# Altium PCB Miner-8Chips.PcbDoc (part 2 of 2)
Units mm, origin at the board's own origin, x right, y up, seen from the top; angles counter-clockwise.
Board outline 80.01 x 98.03 mm, 2 copper layers (Top Layer, Bottom Layer), stack 1.061 mm thick; 329 components, 236 nets, 967 pads, 0 vias.
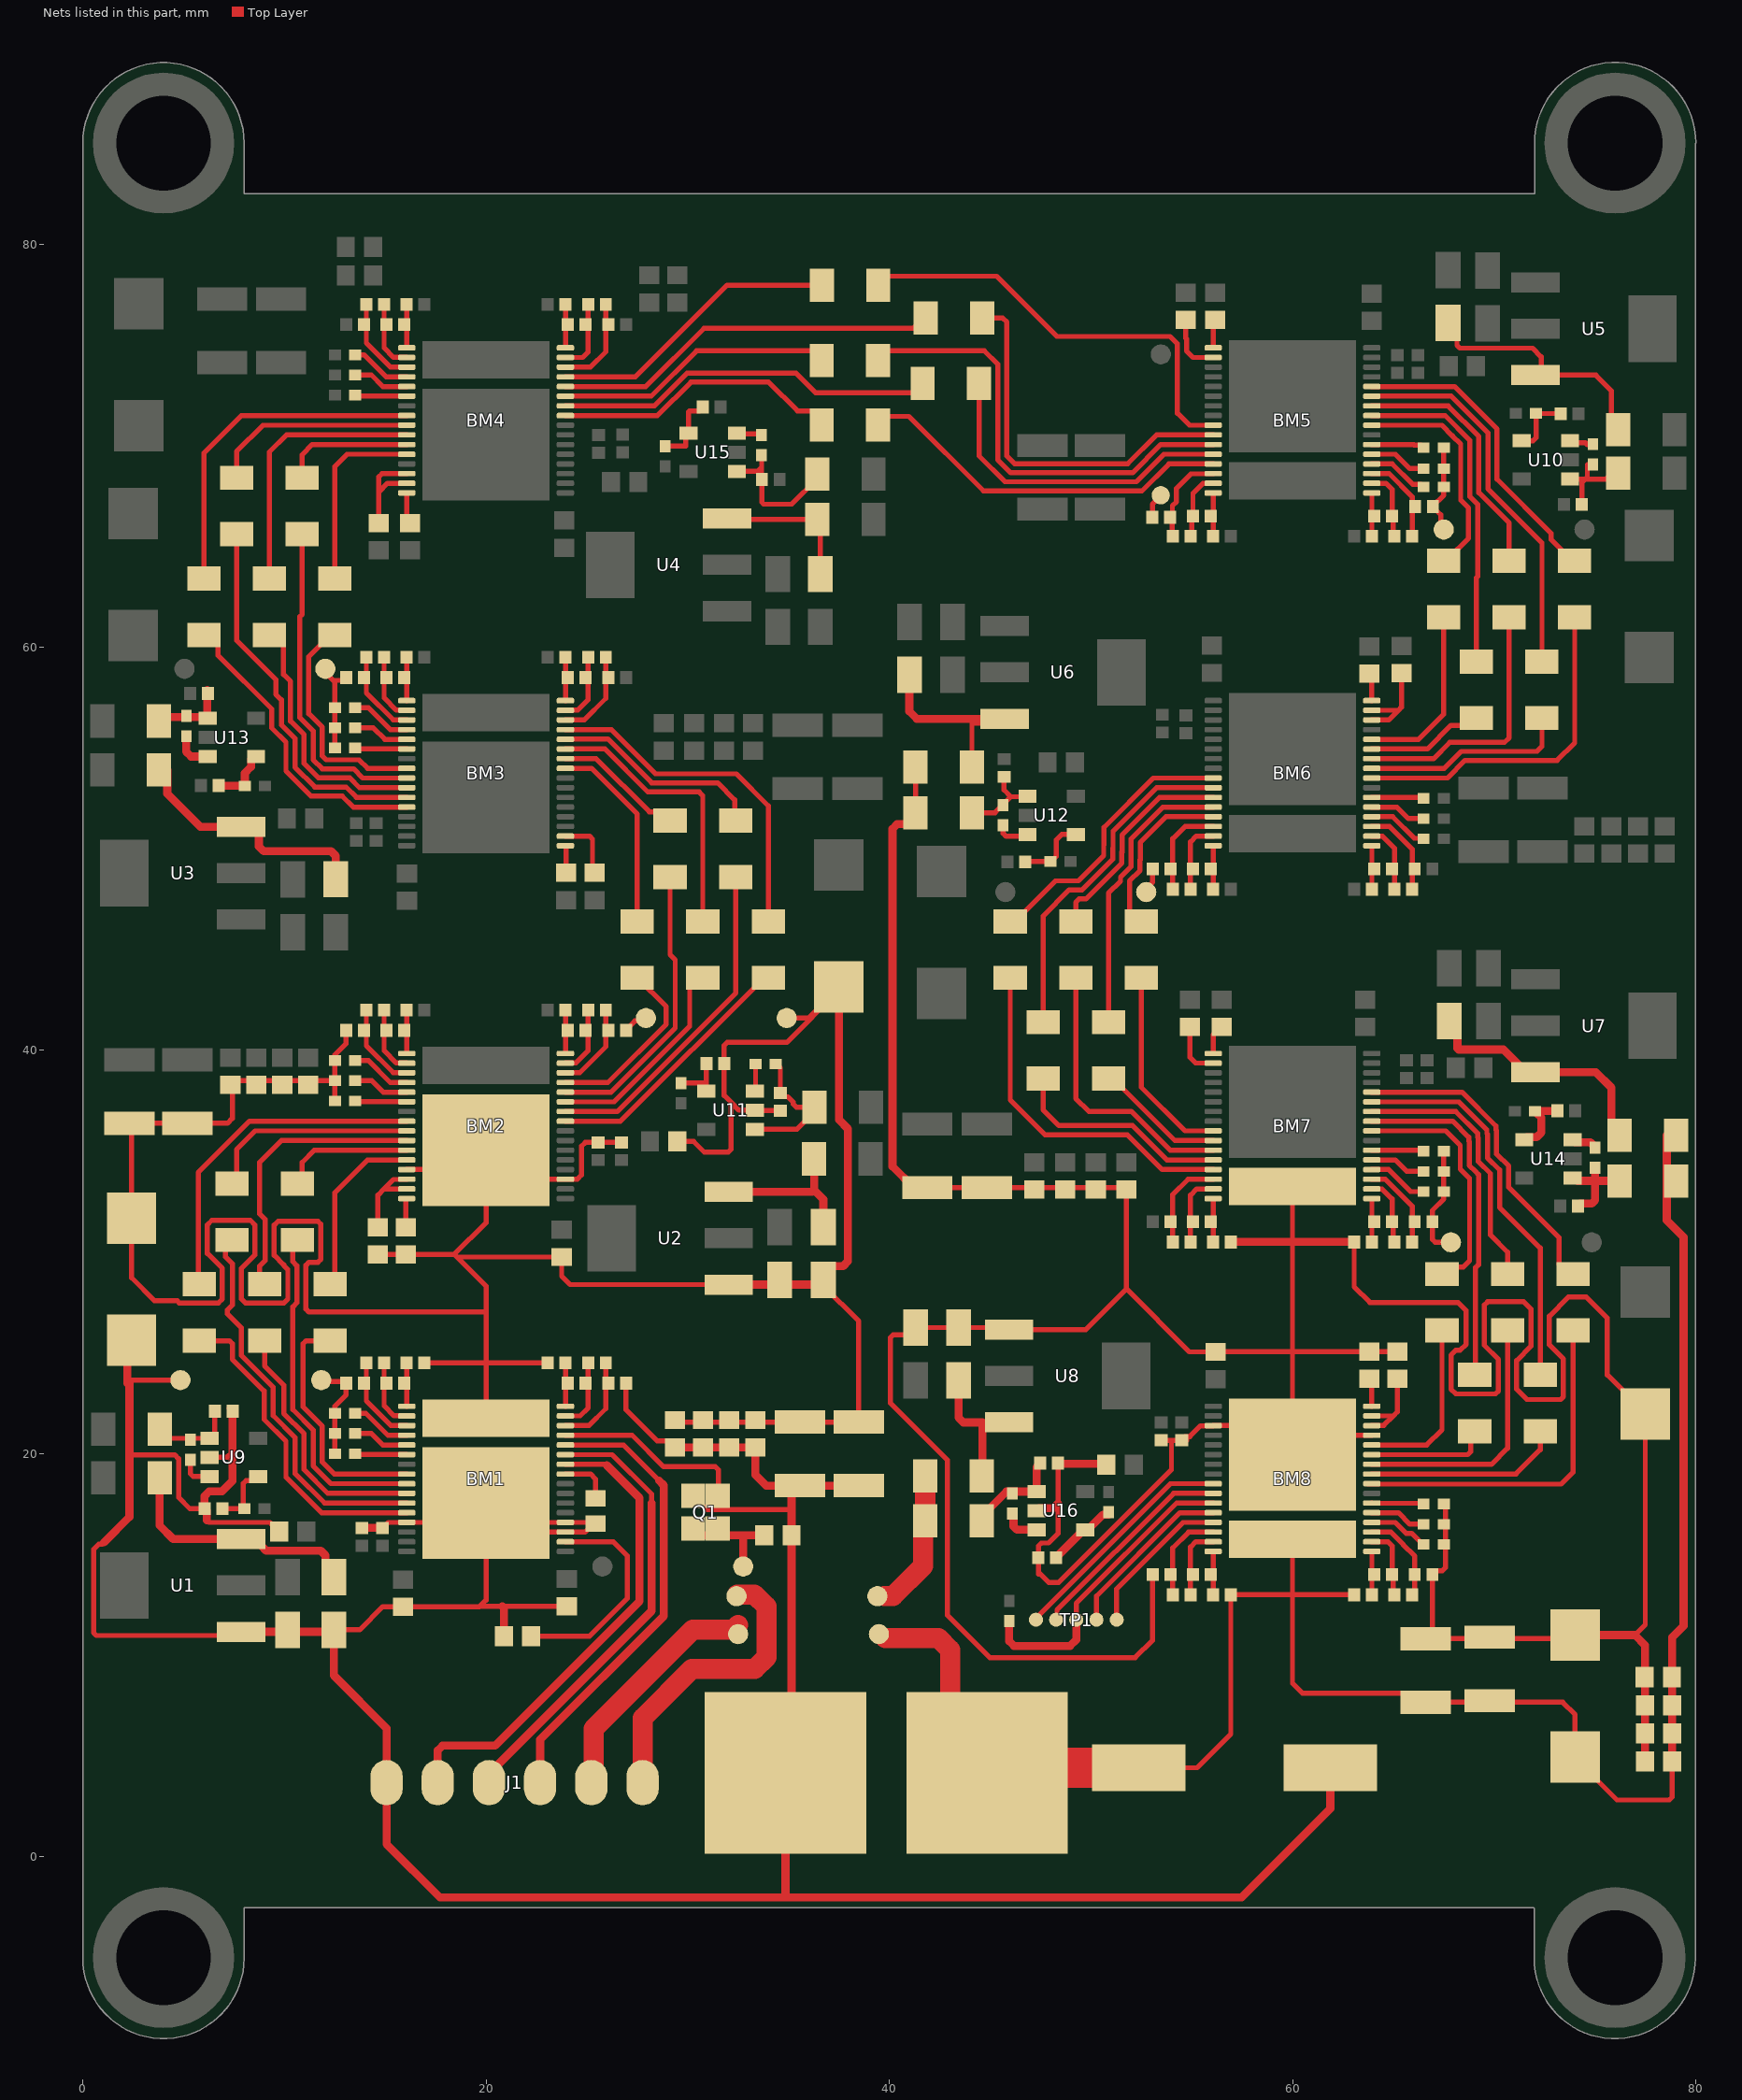
[diagram p2: the nets of this part, all layers, seen from the top]

## Nets (pads, with @x,y where several pads share a name; then routed paths per layer and width w, separated by ;. In a path a pad name is that pad's centre, name@x,y a point inside that pad or via, vN(x,y) a via of type N, cw(c..) or ccw(c..) an arc to the next point about the centre after c; other vN are vias at no path point) (continued)
3.3V-6: BM7.34 BM8.13 BM8.19 BM8.33 C96.2 C97.1 C101.1 C108.2 C113.1 C114.1 C115.1 C116.1 C127.2 C128.2 C129.2 C130.2 C131.1 C132.1 C133.1 C134.1 C135.1 C136.2 C151.2 C152.2 C180.1 C181.1 C182.1 C184.1 R28.1 R30.1 R32.1 R37.2 R38.2 R39.1 R40.1 R46.1 R56.1 U8.1 U16.2 | length 224.2
  Top Layer w0.25: R56.1@41.297,51.791 R46.1@41.297,54.051 ; R38.2@41.885,33.198 R37.2@44.831,33.198 51.665,33.198 C130.2@51.765,33.098 51.765,28.169 ; C180.1@48.37,19.533 48.37,17.53 48.37,16.042 47.899,15.57 47.549,15.57 47.396,15.418 C184.1@47.396,14.834 47.396,14.021 47.496,14.021 47.902,13.614 48.408,13.614 53.996,19.202 53.996,20.646 54,20.65 ; C108.2@53.06,14 53.06,10.744 52.197,9.881 44.983,9.881 42.875,11.989 42.875,19.687 40.056,22.506 40.056,25.756 40.202,25.902 40.95,25.902 C152.2@41.3,26.253 C151.2@43.434,26.253 45.842,26.253 U8.1@45.944,26.151 49.747,26.151 51.765,28.169 ; C182.1@53.746,20.65 54,20.65 ; C181.1@54.508,20.667 54.683,20.842 54.904,20.842 55.441,21.38 56.055,21.38 BM8.19@56.065,21.39 58.56,21.39 BM8.33@60,19.95 ; C181.1@54.762,20.65 54,20.65 ; BM7.34@60,33.25 60,30.647 60.147,30.5 60,30.353 60,25.059 ; C96.2@63.06,30.5 63.06,28.278 63.838,27.5 68.207,27.5 68.614,27.093 68.614,25.424 68.321,25.13 68.107,25.13 67.864,24.887 67.864,23.199 68.101,22.962 70.068,22.962 70.214,23.108 70.214,24.674 69.514,25.374 69.514,27.37 69.677,27.534 71.467,27.534 71.839,27.162 71.839,25.343 71.114,24.618 71.114,23.199 71.631,22.682 73.293,22.682 73.439,22.828 73.439,24.699 72.739,25.399 72.739,26.818 73.683,27.762 74.574,27.762 75.616,26.721 75.616,23.909 77.5,22.025 C131.1@77.5,21.975 77.5,11.516 76.985,11.001 ; BM8.13@63.935,20.91 60.96,20.91 BM8.33@60,19.95 ; C113.1@65.202,25.059 C114.1@63.805,25.059 60,25.059 ; R32.1@67.5,17.5 67.586,17.414 67.586,14.341 67.439,14.195 67.115,14.195 66.94,14.02 C101.1@66.94,14 66.94,11.162 R39.1@66.599,10.821 C136.2@75.108,10.821 ; 51.765,28.169 54.886,25.048 C115.1@56.185,25.048 56.196,25.059 60,25.059 ; BM8.33@60,19.95 60,25.059
  Top Layer w0.4: R56.1@41.297,51.791 41.297,51.623 40.897,51.223 40.392,51.223 40.157,50.988 40.157,34.25 41.21,33.198 R38.2@41.885,33.198 ; U16.2@47.314,17.17 47.439,17.295 48.135,17.295 48.37,17.53 ; C180.1@48.37,19.533 48.408,19.494 50.733,19.494 C116.1@50.771,19.456 ; C97.1@56.94,30.5 60.147,30.5 C96.2@63.06,30.5 ; C136.2@75.108,11.001 76.985,11.001 77.481,10.505 C134.1@77.481,7.518 C133.1@77.481,6.121 C132.1@77.481,4.724
3.3V-7: BM8.34 C104.2 C105.1 C132.2 C133.2 C134.2 C135.2 C136.1 C185.1 J2.2 R39.2 R40.2 R47.1 R62.1 R118.1 | length 98.5
  Top Layer w0.25: C185.1@52.375,4.42 55.27,4.42 56.94,6.089 C105.1@56.94,13 60,13 ; BM8.34@60,15.75 60,13 ; C104.2@63.06,13 60,13 ; C132.2@78.831,4.724 78.831,2.966 78.684,2.819 76.097,2.819 74.016,4.901 C136.1@74.016,4.951 74.016,7.061 73.406,7.671 R39.2@66.599,7.671 66.149,8.121 60.485,8.121 60,8.605 60,13
  Top Layer w0.4: R47.1@78.565,35.789 78.565,31.569 79.4,30.734 79.4,11.455 78.831,10.886 C134.2@78.831,7.518 C133.2@78.831,6.121 C132.2@78.831,4.724
  Top Layer w1: R118.1@39.8,10.846 42.443,10.846 43.029,10.26 43.029,6.802 J2.2@44.853,4.978
  Top Layer w2: J2.2@44.853,4.166 45.107,4.42 C185.1@52.375,4.42
3.3V-8: R48.1 R68.1 R117.1 | length 7
  Top Layer w1: R117.1@39.765,12.929 40.183,12.929 41.68,14.426 41.68,16.562 R68.1@41.78,16.662 R48.1@41.78,18.898
BO1: BM2.8 R81.1 | length 17.1
  Top Layer w0.25: R81.1@6,28.4 5.722,28.678 5.722,33.942 8.271,36.49 BM2.8@16.065,36.49
BO2: BM3.25 R82.2 | length 9.8
  Top Layer w0.25: BM3.25@23.935,53.99 25.233,53.99 27.5,51.723 R82.2@27.5,46.4
BO3: BM4.8 R96.1 | length 17.1
  Top Layer w0.25: R96.1@6,63.4 6,69.627 7.863,71.49 BM4.8@16.065,71.49
BO4: BM5.25 R87.2 | length 21.9
  Top Layer w0.25: R87.2@39.453,77.952 39.903,78.402 45.321,78.402 48.311,75.413 53.924,75.413 54.292,75.045 54.292,71.607 54.889,71.01 BM5.25@56.065,71.01
BO5: BM6.8 R106.1 | length 17.1
  Top Layer w0.25: BM6.8@63.935,53.51 67.684,53.51 68.557,54.382 73.128,54.382 74,55.255 R106.1@74,61.6
BO6: BM7.25 R97.2 | length 9.9
  Top Layer w0.25: R97.2@52.5,43.6 52.5,38.178 54.668,36.01 BM7.25@56.065,36.01
BO7: BM8.8 R116.1 | length 17.5
  Top Layer w0.25: BM8.8@63.729,18.49 73.329,18.49 73.914,19.075 R116.1@73.914,26.108
CI-IN: BM1.28 J1.3 | length 23
  Top Layer w0.25: BM1.28@23.935,20.43 26.814,20.43 28.575,18.669
  Top Layer w0.4: J1.3@22.682,3.683 22.682,5.817 28.81,11.944 28.81,18.434 28.575,18.669
CLK1: BM2.12 R77.1 | length 8.8
  Top Layer w0.25: R77.1@12.5,28.4 12.5,32.947 14.123,34.57 BM2.12@16.065,34.57
CLK2: BM3.29 R86.2 | length 17.4
  Top Layer w0.25: BM3.29@23.935,55.91 26.21,55.91 28.399,53.721 32.41,53.721 34,52.131 R86.2@34,46.4
CLK3: BM4.12 R92.1 | length 9.4
  Top Layer w0.25: R92.1@12.5,63.4 12.5,68.964 13.106,69.57 BM4.12@16.065,69.57
CLK4: BM5.29 R91.2 | length 18.7
  Top Layer w0.25: R91.2@39.453,71.452 40.968,71.452 44.668,67.753 52.538,67.753 53.875,69.09 BM5.29@56.065,69.09
CLK5: BM6.12 R101.1 | length 9
  Top Layer w0.25: BM6.12@63.935,55.43 66.25,55.43 67.5,56.68 R101.1@67.5,61.6
CLK6: BM7.29 R102.2 | length 17.6
  Top Layer w0.25: R102.2@46,43.6 46,37.541 47.72,35.82 51.802,35.82 53.532,34.09 BM7.29@56.065,34.09
CLK7: BM8.12 R111.1 | length 8.7
  Top Layer w0.25: BM8.12@63.935,20.43 66.658,20.43 67.414,21.186 R111.1@67.414,26.108
CLK_IN: BM1.29 Q1.3 | length 9.6
  Top Layer w0.25: BM1.29@23.935,20.91 27.248,20.91 28.804,19.355 31.375,19.355 31.521,19.208 31.521,17.929 Q1.3@31.499,17.907
CO1: BM2.11 R78.1 | length 6.5
  Top Layer w0.25: R78.1@10.875,33.4 10.875,34.446 11.479,35.05 BM2.11@16.065,35.05
CO2: BM3.28 R85.2 | length 11
  Top Layer w0.25: BM3.28@23.749,55.45 26.033,55.45 28.212,53.271 31.489,53.271 32.334,52.426 32.334,51.847 32.131,51.644 R85.2@32.375,51.4
CO3: BM4.11 R93.1 | length 6.5
  Top Layer w0.25: R93.1@10.875,68.4 10.875,69.547 11.378,70.05 BM4.11@16.065,70.05
CO4: BM5.28 R90.2 | length 16.3
  Top Layer w0.25: R90.2@44.453,73.077 44.453,69.491 45.742,68.203 52.251,68.203 53.619,69.57 BM5.28@56.065,69.57
CO5: BM6.11 R103.1 | length 5.9
  Top Layer w0.25: BM6.11@63.935,54.95 66.691,54.95 67.866,56.125 68.65,56.125 R103.1@69.125,56.6
CO6: BM7.28 R100.2 | length 11
  Top Layer w0.25: R100.2@47.625,38.6 47.625,37.059 48.413,36.27 52.071,36.27 53.771,34.57 BM7.28@56.065,34.57
CO7: BM8.11 R113.1 | length 6.1
  Top Layer w0.25: BM8.11@63.935,19.95 68.693,19.95 68.839,20.096 68.839,20.908 R113.1@69.039,21.108
GND: BM1.13 BM1.19 BM1.20 BM1.33 C8.2 C17.1 C18.1 C19.1 C20.1 C49.1 C50.1 C51.1 C52.1 C53.2 C137.2 C138.2 C153.1 C154.1 C155.1 C159.1 C185.2 C187.2 J1.6 J2.1 Q1.2 R13.1 R14.1 R73.2 R74.1 U1.1 U9.2 | length 188.7
  Top Layer w0.25: 1.041,15.596 0.958,15.512 0.793,15.512 0.528,15.247 0.528,11.125 0.674,10.978 7.669,10.978 U1.1@7.853,11.162 ; 2.311,20.117 2.482,19.946 4.548,19.946 4.749,19.745 4.749,17.832 5.309,17.272 C159.1@6.037,17.272 ; 2.311,23.52 2.438,23.647 R74.1@4.839,23.647 ; 6.137,16.698 6.248,16.587 9.281,16.587 9.364,16.504 9.414,16.504 9.739,16.179 C17.1@9.739,16.129 ; U9.2@6.293,19.812 7.137,19.812 7.425,20.1 ; C153.1@7.26,22.263 C153.1@7.425,22.098 ; C137.2@12.446,11.263 13.727,11.263 14.87,12.406 C18.1@15.875,12.406 19.67,12.406 19.696,12.431 ; C155.1@14.859,16.315 14.879,16.315 15.154,16.59 BM1.13@16.065,16.59 19.04,16.59 BM1.33@20,17.55 ; C19.1@24.003,12.431 20.803,12.431 19.696,12.431 ; C8.2@26.94,23.5 26.94,22.184 28.484,20.64 29.037,20.64 C49.1@29.362,20.315 ; Q1.2@30.274,17.907 30.249,17.907 30.074,17.732 30.449,17.732 30.959,17.221 35.128,17.221 35.154,17.247 ; 19.696,12.431 20,12.736 BM1.33@20,17.55 ; BM1.33@20,17.55 BM1.33@20.96,16.59 ; BM1.33@20.96,16.59 21.44,16.11 BM1.19@23.935,16.11 24.9,16.11 25.325,16.535 R73.2@25.425,16.535 25.371,16.59 BM1.20@23.935,16.59 BM1.33@20.96,16.59
  Top Layer w0.4: 1.041,15.596 2.311,16.866 2.311,20.117 2.311,23.52 ; 2.21,23.495 C53.2@2.21,24.94 ; 6.137,16.698 6.137,17.172 C159.1@6.037,17.272 6.037,17.903 6.271,18.137 6.909,18.137 7.425,18.653 7.425,20.1 C153.1@7.425,22.098 ; U1.1@7.853,11.162 12.345,11.162 C137.2@12.446,11.263 12.446,8.992 15.062,6.375 J1.6@15.062,3.683 15.062,0.635 17.704,-2.007 34.773,-2.007 ; C154.1@13.843,16.315 C155.1@14.859,16.315 ; 20.803,12.431 20.89,12.344 C20.1@20.89,10.947 ; C49.1@29.362,20.315 C50.1@30.759,20.315 C51.1@32.055,20.315 C52.1@33.363,20.315 33.363,18.936 33.884,18.415 R13.1@35.529,18.415 ; J2.1@34.853,4.166 J2.1@34.853,3.738 ; J2.1@35.15,4.035 J2.1@34.853,3.738 ; J2.1@35.154,4.166 C187.2@35.154,15.951 35.154,17.247 35.154,18.04 R13.1@35.529,18.415 ; R14.1@38.481,18.415 R13.1@35.56,18.415 R13.1@35.529,18.415 ; C185.2@61.875,4.42 61.875,2.388 57.48,-2.007 34.773,-2.007 ; 34.773,-2.007 34.853,-1.927 J2.1@34.853,3.738
  Top Layer w0.7: C185.2@61.875,4.42 C185.2@61.951,4.344
GND2: BM1.34 BM2.13 BM2.19 BM2.33 C4.2 C5.1 C9.1 C33.1 C34.1 C35.1 C36.1 C49.2 C50.2 C51.2 C52.2 C53.1 C54.1 C55.1 C56.1 C57.1 C58.2 C139.2 C140.2 C161.1 C162.1 C163.1 C167.1 R2.1 R4.1 R6.1 R13.2 R14.2 R15.1 R16.1 R75.2 U2.1 U11.2 | length 172.2
  Top Layer w0.25: R6.1@12.5,37.5 R4.1@12.5,38.5 ; C9.1@13.06,41 13.06,40.34 12.5,39.78 R2.1@12.5,39.5 R4.1@12.5,38.5 ; C33.1@14.63,29.881 C34.1@16.027,29.881 18.426,29.881 ; BM2.13@16.065,34.09 19.04,34.09 BM2.33@20,35.05 ; C4.2@16.94,24.5 20,24.5 ; BM1.34@20,21.75 20,24.5 ; C5.1@23.06,24.5 20,24.5 ; C163.1@26.721,35.441 C162.1@25.552,35.441 24.926,35.441 24.735,35.25 24.735,33.828 24.527,33.62 23.945,33.62 BM2.19@23.935,33.61 21.44,33.61 BM2.33@20,35.05 ; C49.2@29.362,21.665 29.462,21.565 R13.2@35.56,21.565 R14.2@38.481,21.565 38.481,26.574 36.728,28.326 C139.2@36.728,28.469 ; C36.1@29.479,35.484 30.296,35.484 30.829,34.95 32.01,34.95 32.156,35.097 32.156,37.414 ; U2.1@32.034,28.383 24.169,28.383 23.749,28.804 C35.1@23.749,29.754 18.553,29.754 ; C161.1@34.595,37 34.578,37.016 33.348,37.016 U11.2@33.331,37.033 32.537,37.033 32.156,37.414 ; R75.2@34.912,41.605 35.993,41.605 37.49,43.102 C58.2@37.49,43.152 ; C58.2@37.5,42.975 34.919,40.394 31.955,40.394 31.809,40.248 C167.1@31.809,39.345 31.809,37.762 32.156,37.414 ; R4.1@12.5,38.5 7.527,38.5 C57.1@7.315,38.289 7.417,38.187 7.417,36.627 7.179,36.389 R15.1@5.182,36.389 R16.1@2.311,36.389 2.413,36.287 C53.1@2.413,31.676 2.413,28.727 3.559,27.582 4.679,27.582 4.786,27.475 6.725,27.475 6.916,27.666 6.916,29.191 6.172,29.934 6.172,31.344 6.401,31.572 8.303,31.572 8.541,31.335 8.541,29.866 7.866,29.191 7.866,27.666 8.056,27.475 9.975,27.475 10.166,27.666 10.166,29.135 9.964,29.337 9.964,29.364 9.491,29.838 9.491,31.335 9.681,31.525 11.66,31.525 11.806,31.379 11.806,29.636 11.66,29.489 11.212,29.489 11.066,29.343 11.066,27.172 11.212,27.026 19.949,27.026 20,26.975 ; 18.426,29.881 20,31.455 BM2.33@20,35.05 ; 18.426,29.881 18.553,29.754 ; 18.553,29.754 20,28.307 20,26.975 ; 20,24.5 20,26.975
  Top Layer w0.4: U2.1@32.034,28.383 36.5,28.383 C139.2@36.657,28.54 ; C139.2@36.728,28.469 C139.2@36.728,28.611 36.728,28.891 37.143,29.306 37.713,29.306 37.948,29.54 37.948,36.119 37.5,36.566 C58.2@37.5,42.975
NetBM1_1: BM1.1 C3.2 C4.1 | length 2.2
  Top Layer w0.25: C4.1@16.06,24.5 16.063,24.497 16.063,22.353 BM1.1@16.065,22.35
NetBM1_2: BM1.2 C2.2 C3.1 | length 3.5
  Top Layer w0.25: C2.2@14.94,24.5 14.94,22.373 15.433,21.88 16.055,21.88 BM1.2@16.065,21.87
NetBM1_3: BM1.3 C1.2 C2.1 | length 4.4
  Top Layer w0.25: C2.1@14.06,24.5 14.06,22.616 15.276,21.4 16.055,21.4 BM1.3@16.065,21.39
NetBM1_4: BM1.4 R1.2 | length 3
  Top Layer w0.25: R1.2@13.5,22 14.04,22 15.13,20.91 BM1.4@16.065,20.91
NetBM1_5: BM1.5 R3.2 | length 2.8
  Top Layer w0.25: R3.2@13.5,21 14.306,21 14.876,20.43 BM1.5@16.065,20.43
NetBM1_6: BM1.6 R5.2 | length 2.6
  Top Layer w0.25: R5.2@13.5,20 13.54,19.96 16.055,19.96 BM1.6@16.065,19.95
NetBM1_8: BM1.8 R77.2 | length 12.1
  Top Layer w0.25: R77.2@12.266,25.6 11.068,25.6 10.922,25.454 10.922,22.313 11.875,21.36 11.875,19.577 12.462,18.99 BM1.8@16.065,18.99
NetBM1_9: BM1.9 R78.2 | length 17
  Top Layer w0.25: R78.2@10.796,30.6 10.414,30.219 10.414,29.523 10.616,29.321 10.616,27.479 10.414,27.277 10.414,22.185 11.425,21.174 11.425,19.391 12.306,18.51 BM1.9@16.065,18.51
NetBM1_10: BM1.10 R79.2 | length 12.8
  Top Layer w0.25: R79.2@9.016,25.6 9.016,24.352 9.964,23.404 9.964,21.998 10.975,20.987 10.975,19.204 12.149,18.03 BM1.10@16.065,18.03
NetBM1_11: BM1.11 R80.2 | length 19.6
  Top Layer w0.25: R80.2@7.546,30.6 7.071,30.125 7.071,29.771 7.416,29.426 7.416,27.374 7.174,27.133 7.174,26.926 7.866,26.234 7.866,26.05 7.866,24.866 9.442,23.29 9.442,21.884 10.525,20.801 10.525,19.018 11.993,17.55 BM1.11@16.065,17.55
NetBM1_12: BM1.12 R81.2 | length 16.2
  Top Layer w0.25: R81.2@5.766,25.6 7.269,25.6 7.416,25.454 7.416,24.679 8.992,23.103 8.992,21.698 10.075,20.615 10.075,18.832 11.837,17.07 BM1.12@16.065,17.07
NetBM1_18: BM1.18 C20.2 | length 11
  Top Layer w0.25: C20.2@22.24,10.947 25.14,10.947 27,12.807 27,14.935 26.305,15.63 BM1.18@23.935,15.63
NetBM1_25: BM1.25 R73.1 | length 2.6
  Top Layer w0.25: BM1.25@23.935,18.99 25.181,18.99 25.425,18.745 R73.1@25.425,17.785
NetBM1_30: BM1.30 C7.2 C8.1 | length 4.6
  Top Layer w0.25: BM1.30@23.935,21.39 25.098,21.39 25.94,22.232 C7.2@25.94,24.5
NetBM1_31: BM1.31 C6.2 C7.1 | length 3.5
  Top Layer w0.25: BM1.31@23.935,21.87 24.664,21.87 25.06,22.266 C7.1@25.06,24.5
NetBM1_32: BM1.32 C5.2 C6.1 | length 2.2
  Top Layer w0.25: BM1.32@23.935,22.35 23.937,22.353 23.937,24.497 C5.2@23.94,24.5
NetBM2_1: BM2.1 C11.2 C12.1 | length 2.2
  Top Layer w0.25: C12.1@16.06,42 16.063,41.997 16.063,39.853 BM2.1@16.065,39.85
NetBM2_2: BM2.2 C10.2 C11.1 | length 3.4
  Top Layer w0.25: C10.2@14.94,42 14.94,39.99 15.55,39.38 16.055,39.38 BM2.2@16.065,39.37
NetBM2_3: BM2.3 C9.2 C10.1 | length 4.3
  Top Layer w0.25: C10.1@14.06,42 14.06,40.234 15.394,38.9 16.055,38.9 BM2.3@16.065,38.89
NetBM2_4: BM2.4 R2.2 | length 3
  Top Layer w0.25: R2.2@13.5,39.5 14.158,39.5 15.248,38.41 BM2.4@16.065,38.41
NetBM2_5: BM2.5 R4.2 | length 2.8
  Top Layer w0.25: R4.2@13.5,38.5 14.332,38.5 14.902,37.93 BM2.5@16.065,37.93
NetBM2_6: BM2.6 R6.2 | length 2.6
  Top Layer w0.25: R6.2@13.5,37.5 13.54,37.46 16.055,37.46 BM2.6@16.065,37.45
NetBM2_14: BM2.14 BM2.15 C33.2 | length 4.5
  Top Layer w0.25: C33.2@14.63,31.231 14.63,32.817 14.944,33.13 ; BM2.15@16.065,33.13 14.944,33.13 ; BM2.14@16.065,33.61 16.055,33.6 15.414,33.6 14.944,33.13
NetBM2_16: BM2.16 C34.2 | length 1.5
  Top Layer w0.25: C34.2@16.027,31.231 16.027,32.64 16.037,32.65 BM2.16@16.065,32.65
NetBM2_25: BM2.25 R86.1 | length 13
  Top Layer w0.25: BM2.25@23.935,36.49 26.665,36.49 33.775,43.6 R86.1@34,43.6
NetBM2_26: BM2.26 R85.1 | length 16.6
  Top Layer w0.25: BM2.26@23.935,36.97 26.509,36.97 32.385,42.846 32.385,48.59 R85.1@32.375,48.6
NetBM2_27: BM2.27 R84.1 | length 10.5
  Top Layer w0.25: BM2.27@23.935,37.45 26.352,37.45 30.099,41.197 30.099,43.125 30.574,43.6 R84.1@30.75,43.6
NetBM2_28: BM2.28 R83.1 | length 14.4
  Top Layer w0.25: BM2.28@23.935,37.93 26.196,37.93 29.381,41.115 29.381,44.492 29.125,44.748 R83.1@29.125,48.6
NetBM2_29: BM2.29 R82.1 | length 9.1
  Top Layer w0.25: BM2.29@23.935,38.41 26.039,38.41 28.931,41.301 28.931,42.169 R82.1@27.5,43.6
NetBM2_30: BM2.30 C15.2 C16.1 | length 4.4
  Top Layer w0.25: BM2.30@23.935,38.89 24.641,38.89 25.94,40.189 C15.2@25.94,42
NetBM2_31: BM2.31 C14.2 C15.1 | length 3.4
  Top Layer w0.25: BM2.31@23.935,39.37 23.945,39.38 24.45,39.38 25.06,39.99 C15.1@25.06,42
NetBM2_32: BM2.32 C13.2 C14.1 | length 2.2
  Top Layer w0.25: BM2.32@23.935,39.85 23.937,39.853 23.937,41.997 C13.2@23.94,42
NetBM3_1: BM3.1 C23.2 C24.1 | length 2.2
  Top Layer w0.25: C24.1@16.06,59.5 16.063,59.497 16.063,57.353 BM3.1@16.065,57.35
NetBM3_2: BM3.2 C22.2 C23.1 | length 3.4
  Top Layer w0.25: C22.2@14.94,59.5 14.94,57.49 15.55,56.88 16.055,56.88 BM3.2@16.065,56.87
NetBM3_3: BM3.3 C21.2 C22.1 | length 4.3
  Top Layer w0.25: C22.1@14.06,59.5 14.06,57.734 15.394,56.4 16.055,56.4 BM3.3@16.065,56.39
NetBM3_4: BM3.4 R7.2 | length 3
  Top Layer w0.25: R7.2@13.5,57 14.158,57 15.248,55.91 BM3.4@16.065,55.91
NetBM3_5: BM3.5 R8.2 | length 2.8
  Top Layer w0.25: R8.2@13.5,56 14.409,56 14.979,55.43 BM3.5@16.065,55.43
NetBM3_6: BM3.6 R9.2 | length 2.6
  Top Layer w0.25: R9.2@13.5,55 13.54,54.96 16.055,54.96 BM3.6@16.065,54.95
NetBM3_8: BM3.8 R92.2 | length 11.4
  Top Layer w0.25: R92.2@12.5,60.6 12.275,60.6 11.202,59.527 11.202,56.703 11.875,56.03 11.875,54.605 12.065,54.415 13.7,54.415 14.125,53.99 BM3.8@16.065,53.99
NetBM3_9: BM3.9 R93.2 | length 16.5
  Top Layer w0.25: R93.2@10.875,65.6 10.875,61.633 10.752,61.51 10.752,56.517 11.425,55.844 11.425,54.419 11.879,53.965 13.425,53.965 13.88,53.51 BM3.9@16.065,53.51
NetBM3_10: BM3.10 R94.2 | length 12.8
  Top Layer w0.25: R94.2@9.25,60.6 9.475,60.6 9.95,60.125 9.95,58.652 10.302,58.3 10.302,56.33 10.975,55.657 10.975,54.233 11.693,53.515 13.239,53.515 13.724,53.03 BM3.10@16.065,53.03
NetBM3_11: BM3.11 R95.2 | length 18.9
  Top Layer w0.25: R95.2@7.625,65.6 7.625,60.34 9.572,58.393 9.572,57.664 9.852,57.384 9.852,56.144 10.525,55.471 10.525,54.046 11.506,53.065 13.053,53.065 13.568,52.55 BM3.11@16.065,52.55
NetBM3_12: BM3.12 R96.2 | length 15.3
  Top Layer w0.25: R96.2@6,60.6 6.225,60.6 6.7,60.125 6.7,59.6 9.366,56.934 9.366,55.993 10.075,55.284 10.075,53.86 11.32,52.615 12.866,52.615 13.411,52.07 BM3.12@16.065,52.07
NetBM3_17: BM3.17 C31.2 | length 1.4
  Top Layer w0.25: BM3.17@23.935,50.15 23.968,50.15 23.978,50.14 C31.2@23.978,48.808
NetBM3_18: BM3.18 C32.2 | length 3.1
  Top Layer w0.25: BM3.18@23.935,50.63 25.134,50.63 25.281,50.484 25.281,48.902 C32.2@25.375,48.808
NetBM3_30: BM3.30 C27.2 C28.1 | length 4.5
  Top Layer w0.25: BM3.30@23.935,56.39 24.869,56.39 25.94,57.461 C27.2@25.94,59.5
NetBM3_31: BM3.31 C26.2 C27.1 | length 3.4
  Top Layer w0.25: BM3.31@23.935,56.87 23.945,56.88 24.546,56.88 25.06,57.394 C27.1@25.06,59.5
NetBM3_32: BM3.32 C25.2 C26.1 | length 2.2
  Top Layer w0.25: BM3.32@23.935,57.35 23.937,57.353 23.937,59.497 C25.2@23.94,59.5
NetBM4_1: BM4.1 C39.2 C40.1 | length 2.2
  Top Layer w0.25: C40.1@16.06,77 16.063,76.997 16.063,74.853 BM4.1@16.065,74.85
NetBM4_2: BM4.2 C38.2 C39.1 | length 3.5
  Top Layer w0.25: C38.2@14.94,77 14.94,74.849 15.409,74.38 16.055,74.38 BM4.2@16.065,74.37
NetBM4_3: BM4.3 C37.2 C38.1 | length 4.4
  Top Layer w0.25: C38.1@14.06,77 14.06,75.093 15.263,73.89 BM4.3@16.065,73.89
NetBM4_4: BM4.4 R10.2 | length 3
  Top Layer w0.25: R10.2@13.5,74.5 13.943,74.5 15.033,73.41 BM4.4@16.065,73.41
NetBM4_5: BM4.5 R11.2 | length 2.8
  Top Layer w0.25: R11.2@13.5,73.5 14.306,73.5 14.876,72.93 BM4.5@16.065,72.93
NetBM4_6: BM4.6 R12.2 | length 2.6
  Top Layer w0.25: R12.2@13.5,72.5 13.54,72.46 16.055,72.46 BM4.6@16.065,72.45
NetBM4_14: BM4.14 BM4.15 C45.2 | length 5.3
  Top Layer w0.25: C45.2@14.681,66.156 14.681,67.697 ; BM4.15@16.065,68.13 15.114,68.13 14.681,67.697 ; BM4.14@16.065,68.61 14.838,68.61 14.681,68.453 14.681,67.697
NetBM4_16: BM4.16 C46.2 | length 1.6
  Top Layer w0.25: BM4.16@16.065,67.65 16.065,66.321 C46.2@16.231,66.156
NetBM4_25: BM4.25 R91.1 | length 14.1
  Top Layer w0.25: BM4.25@23.935,71.49 28.5,71.49 30.162,73.152 34.011,73.152 35.444,71.718 36.387,71.718 R91.1@36.653,71.452
NetBM4_26: BM4.26 R90.1 | length 19
  Top Layer w0.25: BM4.26@23.935,71.97 28.344,71.97 29.976,73.602 35.364,73.602 36.348,72.619 41.195,72.619 R90.1@41.653,73.077
NetBM4_27: BM4.27 R89.1 | length 13.7
  Top Layer w0.25: BM4.27@23.935,72.45 28.187,72.45 30.439,74.702 R89.1@36.653,74.702
NetBM4_28: BM4.28 R88.1 | length 19.1
  Top Layer w0.25: BM4.28@23.935,72.93 27.921,72.93 30.81,75.819 41.178,75.819 41.653,76.294 R88.1@41.653,76.327
NetBM4_29: BM4.29 R87.1 | length 14.6
  Top Layer w0.25: BM4.29@23.935,73.41 27.411,73.41 31.953,77.952 R87.1@36.653,77.952
NetBM4_30: BM4.30 C43.2 C44.1 | length 4.7
  Top Layer w0.25: BM4.30@23.935,73.89 25.173,73.89 25.94,74.657 C43.2@25.94,77
NetBM4_31: BM4.31 C42.2 C43.1 | length 3.6
  Top Layer w0.25: BM4.31@23.935,74.37 24.789,74.37 25.06,74.641 C43.1@25.06,77
NetBM4_32: BM4.32 C41.2 C42.1 | length 2.2
  Top Layer w0.25: BM4.32@23.935,74.85 23.937,74.853 23.937,76.997 C41.2@23.94,77
NetBM5_1: BM5.1 C71.2 C72.1 | length 2.2
  Top Layer w0.25: BM5.1@63.935,67.65 63.937,67.647 63.937,65.503 C72.1@63.94,65.5
NetBM5_2: BM5.2 C70.2 C71.1 | length 3.6
  Top Layer w0.25: BM5.2@63.935,68.13 64.634,68.13 64.94,67.824 64.94,66.695 65.06,66.575 65.06,66.5 65,66.44 65,65.56 C70.2@65.06,65.5
NetBM5_3: BM5.3 C69.2 C70.1 | length 4.4
  Top Layer w0.25: BM5.3@63.935,68.61 64.791,68.61 65.94,67.461 C70.1@65.94,65.5
NetBM5_4: BM5.4 R21.2 | length 3
  Top Layer w0.25: BM5.4@63.935,69.09 64.947,69.09 65.957,68.08 66.365,68.08 R21.2@66.5,67.945
NetBM5_5: BM5.5 R23.2 | length 2.9
  Top Layer w0.25: BM5.5@63.935,69.57 65.104,69.57 65.814,68.859 R23.2@66.5,68.859
NetBM5_6: BM5.6 R25.2 | length 2.6
  Top Layer w0.25: BM5.6@63.935,70.05 66.018,70.05 66.038,70.029 66.371,70.029 R25.2@66.5,69.901
NetBM5_8: BM5.8 R101.2 | length 11.3
  Top Layer w0.25: BM5.8@63.935,71.01 67.41,71.01 67.935,70.486 68.343,70.078 68.343,67.296 68.732,66.907 68.732,65.407 67.725,64.4 R101.2@67.5,64.4
NetBM5_9: BM5.9 R103.2 | length 16.4
  Top Layer w0.25: BM5.9@63.935,71.49 67.567,71.49 68.793,70.264 68.793,67.483 69.182,67.093 69.182,63.513 69.125,63.455 R103.2@69.125,59.4
NetBM5_10: BM5.10 R104.2 | length 12.6
  Top Layer w0.25: BM5.10@63.935,71.97 67.723,71.97 69.243,70.45 69.243,67.669 70.75,66.162 R104.2@70.75,64.4
NetBM5_11: BM5.11 R105.2 | length 18.9
  Top Layer w0.25: BM5.11@63.935,72.45 67.88,72.45 69.693,70.637 69.693,67.855 72.375,65.173 R105.2@72.375,59.4
NetBM5_12: BM5.12 R106.2 | length 15.2
  Top Layer w0.25: BM5.12@63.935,72.93 68.036,72.93 70.143,70.823 70.143,68.332 72.825,65.649 72.825,65.35 73.775,64.4 R106.2@74,64.4
NetBM5_17: BM5.17 C87.2 | length 1.4
  Top Layer w0.25: BM5.17@56.065,74.85 56.065,76.142 C87.2@56.159,76.236
NetBM5_18: BM5.18 C88.2 | length 3
  Top Layer w0.25: C88.2@54.712,76.236 54.712,75.319 54.742,75.289 54.742,74.696 55.068,74.37 BM5.18@56.065,74.37
NetBM5_30: BM5.30 C75.2 C76.1 | length 4.6
  Top Layer w0.25: C75.2@54.06,65.5 54.026,65.534 54.026,66.5 54.043,66.517 54.043,67.018 54.242,67.218 54.242,67.882 54.96,68.6 56.055,68.6 BM5.30@56.065,68.61
NetBM5_31: BM5.31 C74.2 C75.1 | length 3.4
  Top Layer w0.25: C75.1@54.94,65.5 55,65.56 55,66.44 54.94,66.5 54.94,66.575 55.06,66.695 55.06,67.63 55.55,68.12 56.055,68.12 BM5.31@56.065,68.13
NetBM5_32: BM5.32 C73.2 C74.1 | length 2.2
  Top Layer w0.25: C73.2@56.06,65.5 56.063,65.503 56.063,67.647 BM5.32@56.065,67.65
NetBM6_1: BM6.1 C79.2 C80.1 | length 2.2
  Top Layer w0.25: BM6.1@63.935,50.15 63.937,50.147 63.937,48.003 C80.1@63.94,48
NetBM6_2: BM6.2 C78.2 C79.1 | length 3.4
  Top Layer w0.25: BM6.2@63.935,50.63 63.945,50.62 64.467,50.62 65.06,50.027 C78.2@65.06,48
NetBM6_3: BM6.3 C77.2 C78.1 | length 4.5
  Top Layer w0.25: BM6.3@63.935,51.11 64.814,51.11 65.94,49.984 C78.1@65.94,48
NetBM6_4: BM6.4 R22.2 | length 3
  Top Layer w0.25: BM6.4@63.935,51.59 64.971,51.59 66.04,50.521 66.479,50.521 R22.2@66.5,50.5
NetBM6_5: BM6.5 R24.2 | length 2.8
  Top Layer w0.25: BM6.5@63.935,52.07 65.176,52.07 65.746,51.5 R24.2@66.5,51.5
NetBM6_6: BM6.6 R26.2 | length 2.6
  Top Layer w0.25: BM6.6@63.935,52.55 63.945,52.54 66.46,52.54 R26.2@66.5,52.5
NetBM6_14: BM6.14 BM6.15 C89.2 | length 4.7
  Top Layer w0.25: BM6.14@63.935,56.39 64.772,56.39 65.252,56.87 ; BM6.15@63.935,56.87 65.252,56.87 ; C89.2@65.405,58.71 65.405,57.023 65.252,56.87
NetBM6_16: BM6.16 C90.2 | length 1.4
  Top Layer w0.25: C90.2@63.805,58.685 63.935,58.555 BM6.16@63.935,57.35
NetBM6_25: BM6.25 R102.1 | length 13.8
  Top Layer w0.25: R102.1@46,46.4 46.225,46.4 48.237,48.412 49.375,48.412 50.635,49.673 50.635,50.2 50.648,50.213 50.648,51.057 53.101,53.51 BM6.25@56.065,53.51
NetBM6_26: BM6.26 R100.1 | length 17.1
  Top Layer w0.25: R100.1@47.625,41.4 47.625,46.66 48.928,47.962 49.561,47.962 51.085,49.486 51.085,50.014 51.098,50.026 51.098,50.87 53.257,53.03 BM6.26@56.065,53.03
NetBM6_27: BM6.27 R99.1 | length 10.7
  Top Layer w0.25: R99.1@49.25,46.4 49.25,47.347 49.416,47.512 49.748,47.512 51.535,49.3 51.535,49.827 51.548,49.84 51.548,50.684 53.414,52.55 BM6.27@56.065,52.55
NetBM6_28: BM6.28 R98.1 | length 14.3
  Top Layer w0.25: R98.1@50.875,41.4 50.875,47.802 51.468,48.395 51.468,48.597 51.985,49.113 51.985,49.641 51.998,49.654 51.998,50.498 53.57,52.07 BM6.28@56.065,52.07
NetBM6_29: BM6.29 R97.1 | length 8.6
  Top Layer w0.25: R97.1@52.5,46.4 52.393,46.4 51.918,46.875 51.918,48.41 52.435,48.927 52.435,49.455 52.448,49.467 52.448,50.311 53.726,51.59 BM6.29@56.065,51.59
NetBM6_30: BM6.30 C83.2 C84.1 | length 4.8
  Top Layer w0.25: C83.2@54.06,48 54.06,50.504 54.666,51.11 BM6.30@56.065,51.11
NetBM6_31: BM6.31 C82.2 C83.1 | length 3.6
  Top Layer w0.25: C83.1@54.94,48 54.94,50.343 55.227,50.63 BM6.31@56.065,50.63
NetBM6_32: BM6.32 C81.2 C82.1 | length 2.2
  Top Layer w0.25: C81.2@56.06,48 56.063,48.003 56.063,50.147 BM6.32@56.065,50.15
NetBM7_1: BM7.1 C95.2 C96.1 | length 2.2
  Top Layer w0.25: BM7.1@63.935,32.65 63.937,32.647 63.937,30.503 C96.1@63.94,30.5
NetBM7_2: BM7.2 C94.2 C95.1 | length 3.4
  Top Layer w0.25: BM7.2@63.935,33.13 63.945,33.12 64.45,33.12 64.94,32.63 64.94,31.695 65.06,31.575 65.06,31.5 65,31.44 65,30.56 C94.2@65.06,30.5
NetBM7_3: BM7.3 C93.2 C94.1 | length 4.3
  Top Layer w0.25: BM7.3@63.935,33.61 64.61,33.61 65.94,32.28 65.94,31.5 C94.1@65.94,30.5
NetBM7_4: BM7.4 R27.2 | length 3
  Top Layer w0.25: BM7.4@63.935,34.09 64.767,34.09 65.857,33 R27.2@66.5,33
NetBM7_5: BM7.5 R29.2 | length 2.8
  Top Layer w0.25: BM7.5@63.935,34.57 65.1,34.57 65.67,34 R29.2@66.5,34
NetBM7_6: BM7.6 R31.2 | length 2.6
  Top Layer w0.25: BM7.6@63.935,35.05 63.945,35.04 66.46,35.04 R31.2@66.5,35
NetBM7_8: BM7.8 R111.2 | length 12.2
  Top Layer w0.25: BM7.8@63.935,36.01 67.599,36.01 68.32,35.289 68.32,34.116 68.783,33.653 68.783,29.566 68.468,29.25 67.756,29.25 R111.2@67.414,28.908
NetBM7_9: BM7.9 R113.2 | length 17.2
  Top Layer w0.25: BM7.9@63.935,36.49 67.942,36.49 68.742,35.69 68.742,35.503 68.77,35.475 68.77,34.303 69.081,33.992 69.233,33.839 69.233,29.379 69.081,29.227 69.064,29.21 69.064,25.187 69.081,25.17 69.081,23.95 R113.2@69.039,23.908
NetBM7_10: BM7.10 R114.2 | length 13.3
  Top Layer w0.25: BM7.10@63.935,36.97 68.099,36.97 69.192,35.877 69.192,35.69 69.22,35.662 69.22,34.489 69.82,33.889 69.82,30.84 70.664,29.996 R114.2@70.664,28.908
NetBM7_11: BM7.11 R115.2 | length 19.5
  Top Layer w0.25: BM7.11@63.935,37.45 68.255,37.45 69.642,36.063 69.642,35.876 69.67,35.848 69.67,34.676 70.27,34.076 70.27,32.219 72.289,30.2 R115.2@72.289,23.908
NetBM7_12: BM7.12 R116.2 | length 15.9
  Top Layer w0.25: BM7.12@63.935,37.93 68.411,37.93 70.092,36.249 70.092,36.062 70.12,36.035 70.12,34.862 70.72,34.262 70.72,33.211 73.214,30.716 73.214,29.383 73.689,28.908 R116.2@73.914,28.908
NetBM7_17: BM7.17 C111.2 | length 1.5
  Top Layer w0.25: BM7.17@56.065,39.85 56.065,40.785 56.44,41.159 C111.2@56.49,41.159
NetBM7_18: BM7.18 C112.2 | length 2.8
  Top Layer w0.25: C112.2@54.915,41.159 54.915,39.649 55.194,39.37 BM7.18@56.065,39.37
NetBM7_30: BM7.30 C99.2 C100.1 | length 4.7
  Top Layer w0.25: C99.2@54.06,30.5 54.06,32.851 54.819,33.61 BM7.30@56.065,33.61
NetBM7_31: BM7.31 C98.2 C99.1 | length 3.6
  Top Layer w0.25: C99.1@54.94,30.5 54.94,32.817 55.253,33.13 BM7.31@56.065,33.13
NetBM7_32: BM7.32 C97.2 C98.1 | length 2.2
  Top Layer w0.25: C97.2@56.06,30.5 56.063,30.503 56.063,32.647 BM7.32@56.065,32.65
NetBM8_1: BM8.1 C103.2 C104.1 | length 2.2
  Top Layer w0.25: BM8.1@63.935,15.15 63.937,15.147 63.937,13.003 C104.1@63.94,13
NetBM8_2: BM8.2 C102.2 C103.1 | length 3.6
  Top Layer w0.25: BM8.2@63.935,15.63 64.734,15.63 64.94,15.424 64.94,14.195 65.06,14.075 65.06,14 65,13.94 65,13.06 C102.2@65.06,13
NetBM8_3: BM8.3 C101.2 C102.1 | length 4.6
  Top Layer w0.25: BM8.3@63.935,16.11 64.891,16.11 65.478,15.523 65.478,15.502 66.065,14.915 66.065,13.125 C102.1@65.94,13
NetBM8_4: BM8.4 R28.2 | length 3
  Top Layer w0.25: BM8.4@63.935,16.59 65.099,16.59 65.639,16.05 65.91,16.05 66.46,15.5 R28.2@66.5,15.5
NetBM8_5: BM8.5 R30.2 | length 2.8
  Top Layer w0.25: BM8.5@63.935,17.07 65.255,17.07 65.825,16.5 R30.2@66.5,16.5
NetBM8_6: BM8.6 R32.2 | length 2.6
  Top Layer w0.25: BM8.6@63.935,17.55 63.945,17.54 66.46,17.54 R32.2@66.5,17.5
NetBM8_14: BM8.14 BM8.15 C113.2 | length 4.3
  Top Layer w0.25: BM8.14@63.935,21.39 63.945,21.4 64.529,21.4 64.999,21.87 ; BM8.15@63.935,21.87 64.999,21.87 ; C113.2@65.202,23.709 65.202,22.073 64.999,21.87
NetBM8_16: BM8.16 C114.2 | length 1.4
  Top Layer w0.25: C114.2@63.805,23.709 63.935,23.579 BM8.16@63.935,22.35
NetBM8_25: BM8.25 TP1.5 | length 11.6
  Top Layer w0.25: TP1.5@47.276,11.76 47.276,11.841 53.945,18.51 BM8.25@56.065,18.51
NetBM8_26: BM8.26 TP1.4 | length 10.6
  Top Layer w0.25: TP1.4@48.276,11.76 48.316,11.801 48.316,12.245 54.101,18.03 BM8.26@56.065,18.03
NetBM8_27: BM8.27 R107.2 TP1.3 | length 15.2
  Top Layer w0.25: TP1.3@49.276,11.76 49.276,12.568 54.258,17.55 BM8.27@56.065,17.55
  Top Layer w0.4: R107.2@45.949,11.692 45.949,10.699 46.183,10.465 48.971,10.465 49.276,10.77 TP1.3@49.276,11.76
NetBM8_28: BM8.28 TP1.2 | length 8.7
  Top Layer w0.25: TP1.2@50.276,11.76 50.276,12.932 54.414,17.07 BM8.28@56.065,17.07
NetBM8_29: BM8.29 TP1.1 | length 7.7
  Top Layer w0.25: TP1.1@51.276,11.76 51.276,13.296 51.633,13.653 54.57,16.59 BM8.29@56.065,16.59
NetBM8_30: BM8.30 C107.2 C108.1 | length 4.7
  Top Layer w0.25: C107.2@54.06,13 54.06,15.325 54.845,16.11 BM8.30@56.065,16.11
NetBM8_31: BM8.31 C106.2 C107.1 | length 3.6
  Top Layer w0.25: C107.1@54.94,13 54.94,15.367 55.203,15.63 BM8.31@56.065,15.63
NetBM8_32: BM8.32 C105.2 C106.1 | length 2.2
  Top Layer w0.25: C105.2@56.06,13 56.063,13.003 56.063,15.147 BM8.32@56.065,15.15
NetC1_1: C1.1 R1.1 R3.1 R5.1 R74.2 | length 5
  Top Layer w0.25: R74.2@11.824,23.647 11.897,23.574 12.986,23.574 C1.1@13.06,23.5 13.06,22.915 12.5,22.355 R1.1@12.5,22 R3.1@12.5,21 R5.1@12.5,20
NetC16_2: C16.2 R75.1 | length 1.2
  Top Layer w0.25: C16.2@26.94,41 26.94,41.02 27.382,41.462 27.784,41.462 R75.1@27.927,41.605
NetC21_1: C21.1 R7.1 R8.1 R9.1 R76.2 | length 4.8
  Top Layer w0.25: R76.2@12.027,58.928 12.027,58.725 12.5,58.252 ; R9.1@12.5,55 R8.1@12.5,56 R7.1@12.5,57 12.5,58.252 ; C21.1@13.06,58.5 12.914,58.354 12.5,58.354 12.5,58.252
NetC69_1: C69.1 R21.1 R23.1 R25.1 R108.2 | length 4.5
  Top Layer w0.25: R108.2@67.501,65.837 67.357,65.98 67.357,66.565 66.963,66.96 C69.1@66.963,66.98 66.963,67 67.5,67.537 R21.1@67.5,67.945 R23.1@67.5,68.859 R25.1@67.5,69.901
NetC76_2: C76.2 R109.1 | length 1.3
  Top Layer w0.25: C76.2@53.052,66.446 53.052,67.092 53.467,67.506 R109.1@53.467,67.539
NetC84_2: C84.2 R110.1 | length 1.3
  Top Layer w0.25: R110.1@52.743,47.854 52.743,48.03 53.06,48.347 C84.2@53.06,49
NetC93_1: C93.1 R27.1 R29.1 R31.1 R112.2 | length 5.6
  Top Layer w0.25: R31.1@67.5,35 R29.1@67.5,34 R27.1@67.5,33 67.5,32.626 66.94,32.066 C93.1@66.94,31.5 66.94,30.626 67.086,30.48 R112.2@67.856,30.48
NetC137_1: C137.1 R41.2 U1.3 | length 12.5
  Top Layer w0.4: R41.2@3.813,18.796 3.813,16.431 4.482,15.762 U1.3@7.853,15.762 8.553,15.762 8.853,15.462 8.853,15.424 9.087,15.189 11.797,15.189 12.031,14.955 12.031,14.298 C137.1@12.446,13.883
NetC139_1: C139.1 R42.2 U2.3 | length 7.9
  Top Layer w0.4: U2.3@32.034,32.983 36.178,32.983 36.268,33.074 ; R42.2@36.268,34.62 36.268,33.074 ; C139.1@36.728,31.231 36.728,32.614 36.268,33.074
NetC141_1: C141.1 R43.2 U3.3 | length 12.4
  Top Layer w0.4: R43.2@4.169,53.924 4.188,53.905 4.188,52.734 5.828,51.093 U3.3@7.853,51.093 8.432,51.093 8.732,50.793 8.732,50.12 8.966,49.886 12.313,49.886 12.548,49.651 C141.1@12.548,48.489
NetC143_1: C143.1 R44.2 U4.3 | length 7.3
  Top Layer w0.25: U4.3@31.958,66.384 31.997,66.345 R44.2@36.421,66.345 36.576,66.189 C143.1@36.576,63.631
NetC145_1: C145.1 R45.2 U5.3 | length 11.8
  Top Layer w0.25: C145.1@67.894,75.621 68.158,75.357 68.158,74.98 68.304,74.833 71.902,74.833 72.335,74.401 72.335,73.494 75.046,73.494 75.816,72.723 R45.2@75.816,70.79
NetC147_1: C147.1 R46.2 U6.3 | length 10.6
  Top Layer w0.25: R46.2@44.097,54.051 44.097,56.239 45.504,56.239 U6.3@45.716,56.45
  Top Layer w0.4: C147.1@40.996,58.634 40.996,56.82 41.365,56.45 U6.3@45.716,56.45
NetC149_1: C149.1 R47.2 U7.3 | length 12.5
  Top Layer w0.4: C149.1@67.767,41.464 68.182,41.049 68.182,40.098 68.239,40.041 70.467,40.041 71.584,38.924 72.284,38.924 75.046,38.924 75.819,38.151 75.819,36.648 75.822,36.645 75.822,36.189 R47.2@76.222,35.789
NetC151_1: C151.1 R48.2 U8.3 | length 5.8
  Top Layer w0.4: C151.1@43.434,23.633 43.434,21.785 43.668,21.551 44.628,21.551 44.628,18.945 R48.2@44.58,18.898
NetC153_2: C153.2 R49.2 R51.1 U9.1 | length 4.1
  Top Layer w0.25: R49.2@3.813,21.209 4.26,20.762 U9.1@6.293,20.762 6.345,20.762 6.545,20.962 C153.2@6.545,22.098
NetC156_2: C156.2 R50.2 R52.1 U10.1 | length 4.5
  Top Layer w0.25: U10.1@73.514,68.341 74.533,68.341 ; C156.2@74.354,67.056 74.354,68.162 74.533,68.341 ; 74.625,69.045 74.625,68.434 74.533,68.341 ; R50.2@75.816,68.605 75.552,68.341 74.625,68.341 74.533,68.341
NetC159_2: C159.2 R53.1 U9.4 | length 3.2
  Top Layer w0.25: C159.2@6.917,17.272 R53.1@8.009,17.272 7.95,17.331 7.95,18.516 8.097,18.662 8.493,18.662 U9.4@8.693,18.862
NetC160_2: C160.2 R54.1 U10.4 | length 3.5
  Top Layer w0.25: U10.4@71.114,70.241 71.931,70.241 72.077,70.388 R54.1@72.077,71.603 72.09,71.59 73.283,71.59 C160.2@73.296,71.577
NetC161_2: C161.2 R55.2 R57.1 U11.1 | length 7.2
  Top Layer w0.25: U11.1@33.331,36.083 35.416,36.083 36.294,36.961 R55.2@36.294,37.186 35.386,37.186 35.24,37.332 35.24,37.434 34.969,37.705 34.77,37.705 C161.2@34.595,37.88 34.595,39.131 34.406,39.319 R57.1@34.366,39.319
NetC164_2: C164.2 R56.2 R58.1 U12.1 | length 4.2
  Top Layer w0.25: R56.2@44.097,51.791 45.241,51.791 46.032,52.582 ; C164.2@45.695,53.569 45.695,52.919 46.032,52.582 ; U12.1@46.857,52.614 46.825,52.582 46.032,52.582
NetC167_2: C167.2 R59.1 U11.4 | length 2.3
  Top Layer w0.25: R59.1@29.667,38.379 30.878,38.379 30.929,38.329 C167.2@30.929,39.345
NetC168_2: C168.2 R60.1 U12.4 | length 3.6
  Top Layer w0.25: C168.2@46.744,49.352 46.757,49.365 48.016,49.365 48.285,49.634 48.285,50.444 48.555,50.714 U12.4@49.257,50.714
NetC169_2: C169.2 R61.2 R63.1 U13.1 | length 4
  Top Layer w0.4: R61.2@3.762,56.337 4.016,56.591 4.067,56.54 5.131,56.54 U13.1@6.161,56.54 ; C169.2@6.161,57.881 U13.1@6.161,56.54 ; U13.1@6.191,56.474 6.161,56.505 U13.1@6.161,56.54 ; C169.2@6.206,57.836 C169.2@6.237,57.805
NetC172_2: C172.2 R62.2 R64.1 U14.1 | length 5
  Top Layer w0.4: U14.1@73.895,33.67 74.02,33.67 74.162,33.528 75.006,33.528 ; C172.2@74.159,32.283 74.159,32.303 74.259,32.403 74.847,32.403 75.006,32.563 75.006,33.528 ; R64.1@75.006,34.171 75.006,33.528 ; R62.2@76.222,33.528 75.006,33.528
NetC175_2: C175.2 R65.1 U13.4 | length 3.1
  Top Layer w0.4: C175.2@6.739,53.137 6.752,53.124 8.022,53.124 R65.1@8.034,53.111 8.034,53.754 8.341,54.061 8.341,54.449 8.466,54.574 U13.4@8.591,54.574
NetC176_2: C176.2 R66.1 U14.4 | length 3.3
  Top Layer w0.4: U14.4@71.495,35.57 71.62,35.695 72.113,35.695 72.347,35.93 72.347,36.661 72.126,36.882 72.126,36.922 72.066,36.982 R66.1@72.026,36.982 72.039,36.995 73.131,36.995 C176.2@73.144,37.008
NetC177_2: C177.2 R67.2 R69.1 U15.1 | length 7.2
  Top Layer w0.25: U15.1@32.442,68.722 33.463,68.722 33.668,68.927 ; R69.1@33.655,69.528 33.668,69.515 33.668,68.927 ; R67.2@36.421,68.58 36.421,68.355 35.16,67.094 33.769,67.094 33.68,67.183 C177.2@33.68,68.326 33.668,68.339 33.668,68.927
NetC180_2: C180.2 R68.2 R70.1 U16.1 | length 5
  Top Layer w0.4: R68.2@44.58,16.662 44.58,16.887 45.813,18.12 U16.1@47.314,18.12 47.314,19.337 47.49,19.513 C180.2@47.49,19.533
NetC183_2: C183.2 R71.1 U15.4 | length 3.6
  Top Layer w0.25: R71.1@28.88,69.969 29.894,69.969 29.894,70.474 U15.4@30.042,70.622 30.042,71.671 30.083,71.712 30.576,71.712 30.751,71.887 C183.2@30.751,71.907
NetC184_2: C184.2 R72.1 U16.4 | length 3.5
  Top Layer w0.4: C184.2@48.276,14.834 48.376,14.934 48.376,14.954 49.464,16.041 49.464,16.095 49.589,16.22 49.839,16.22 50.594,16.975 R72.1@50.876,16.975
NetC187_1: C187.1 Q1.1 Q1.4 R119.1 | length 5.4
  Top Layer w0.4: Q1.1@30.274,16.282 30.274,16.051 30.374,15.951 32.69,15.951 ; R119.1@32.753,14.402 32.753,15.888 32.69,15.951 ; C187.1@33.804,15.951 32.69,15.951
NetJ1_1: J1.1 R117.2 | length 14.8
  Top Layer w1: J1.1@27.762,3.683 27.762,6.878 30.206,9.322 33.323,9.322 33.909,9.908 33.909,12.415 33.319,13.005 R117.2@32.448,13.005
NetJ1_2: J1.2 R118.2 | length 12
  Top Layer w1: J1.2@25.222,3.683 25.337,3.798 25.337,6.363 30.251,11.278 32.271,11.278 R118.2@32.499,11.506
NetR51_2: R51.2 U9.3 | length 1.7
  Top Layer w0.25: R51.2@5.334,19.693 5.334,19.008 5.48,18.862 U9.3@6.293,18.862
NetR52_2: R52.2 U10.3 | length 1.2
  Top Layer w0.25: U10.3@73.514,70.241 73.612,70.143 74.527,70.143 74.625,70.045
NetR57_2: R57.2 U11.3 | length 1.4
  Top Layer w0.25: U11.3@33.331,37.983 33.366,38.018 R57.2@33.366,39.319
NetR58_2: R58.2 U12.3 | length 1.7
  Top Layer w0.25: R58.2@45.644,51.164 45.644,50.769 45.79,50.622 46.765,50.622 U12.3@46.857,50.714
NetR63_2: R63.2 U13.3 | length 1.9
  Top Layer w0.4: R63.2@5.131,55.583 5.131,54.813 5.37,54.574 U13.3@6.191,54.574
NetR64_2: R64.2 U14.3 | length 1.3
  Top Layer w0.4: U14.3@73.895,35.57 74.02,35.445 74.772,35.445 75.006,35.211 R64.2@75.006,35.171
NetR69_2: R69.2 U15.3 | length 1.3
  Top Layer w0.25: U15.3@32.442,70.622 32.489,70.575 33.608,70.575 R69.2@33.655,70.528
NetR70_2: R70.2 U16.3 | length 1.9
  Top Layer w0.4: R70.2@46.101,17.026 46.161,16.966 46.161,16.395 46.335,16.22 U16.3@47.314,16.22
RI1: BM2.10 R79.1 | length 14.2
  Top Layer w0.25: R79.1@9.171,28.4 8.763,28.808 8.763,29.297 9.041,29.574 9.041,31.626 8.763,31.904 8.763,34.442 9.851,35.53 BM2.10@16.065,35.53
RI2: BM3.27 R84.2 | length 14
  Top Layer w0.25: BM3.27@23.935,54.95 25.897,54.95 28.026,52.821 30.567,52.821 30.75,52.638 R84.2@30.75,46.4
RI3: BM4.10 R94.1 | length 13.4
  Top Layer w0.25: R94.1@9.25,63.4 9.25,69.677 10.103,70.53 BM4.10@16.065,70.53
RI4: BM5.27 R89.2 | length 22.5
  Top Layer w0.25: R89.2@39.453,74.702 44.713,74.702 45.378,74.037 45.378,69.303 46.029,68.653 52.065,68.653 53.462,70.05 BM5.27@56.065,70.05
RI5: BM6.10 R104.1 | length 13.3
  Top Layer w0.25: BM6.10@63.935,54.47 66.992,54.47 67.805,55.282 70.522,55.282 70.75,55.51 R104.1@70.75,61.6
RI6: BM7.27 R99.2 | length 13.9
  Top Layer w0.25: R99.2@49.25,43.6 49.25,37.618 49.891,36.977 52.001,36.977 53.928,35.05 BM7.27@56.065,35.05
RI7: BM8.10 R114.1 | length 12.9
  Top Layer w0.25: BM8.10@63.935,19.47 69.87,19.47 70.664,20.264 R114.1@70.664,26.108
RO-IN: BM1.27 J1.4 | length 22.7
  Top Layer w0.25: BM1.27@23.935,19.95 26.253,19.95 28.21,17.993 28.21,17.551
  Top Layer w0.4: J1.4@20.142,3.683 20.142,4.125 28.21,12.193 28.21,17.551
RST1: BM2.9 R80.1 | length 10.5
  Top Layer w0.25: R80.1@7.625,33.4 7.625,35.082 8.553,36.01 BM2.9@16.065,36.01
RST2: BM3.26 R83.2 | length 6.5
  Top Layer w0.25: BM3.26@23.935,54.47 25.464,54.47 28.102,51.832 28.693,51.832 R83.2@29.125,51.4
RST3: BM4.9 R95.1 | length 10.3
  Top Layer w0.25: R95.1@7.625,68.4 7.625,69.703 8.932,71.01 BM4.9@16.065,71.01
RST4: BM5.26 R88.2 | length 19.1
  Top Layer w0.25: R88.2@44.453,76.327 45.624,76.327 45.828,76.123 45.828,69.49 46.215,69.103 51.5,69.103 51.829,69.103 53.256,70.53 BM5.26@56.065,70.53
RST5: BM6.9 R105.1 | length 10.4
  Top Layer w0.25: BM6.9@63.935,53.99 67.528,53.99 68.37,54.832 72.13,54.832 72.375,55.078 R105.1@72.375,56.6
RST6: BM7.26 R98.2 | length 6.5
  Top Layer w0.25: R98.2@50.875,38.6 51.181,38.294 51.406,38.294 54.17,35.53 BM7.26@56.065,35.53
RST7: BM8.9 R115.1 | length 9.8
  Top Layer w0.25: BM8.9@63.935,18.99 71.085,18.99 72.289,20.194 R115.1@72.289,21.108
RST-IN: BM1.26 J1.5 | length 24.2
  Top Layer w0.25: BM1.26@23.935,19.47 25.939,19.47 25.984,19.425
  Top Layer w0.4: J1.5@17.602,3.683 17.602,5.277 17.837,5.512 20.447,5.512 27.61,12.675 27.61,17.799 25.984,19.425
pads on no net: BM1.7 BM1.21 BM1.22 BM1.23 BM1.24 BM2.7 BM2.20 BM2.21 BM2.22 BM2.23 BM2.24 BM3.7 BM3.21 BM3.22 BM3.23 BM3.24 BM4.7 BM4.20 BM4.21 BM4.22 BM4.23 BM4.24 BM5.7 BM5.21 BM5.22 BM5.23 BM5.24 BM6.7 BM6.20 BM6.21 BM6.22 BM6.23 BM6.24 BM7.7 BM7.21 BM7.22 BM7.23 BM7.24 BM8.7 BM8.20 BM8.21 BM8.22 BM8.23 BM8.24

## Keep-outs
Keep-Out Layer:
  lines w0.2: 0,-5 0,85 ; 8,-5.015 8,-2.515 71.96,-2.515 ; 8,85 8,82.5 72.009,82.5 72.009,85.01 ; 71.985,-5.015 71.985,-2.54 ; 80,-5 80,85
  lines w0.254: 0,-5.015 ccw(c4,-5.015) 8,-5.015 ; 0,85 cw(c4,85) 8,85 ; 71.985,-5.015 ccw(c75.985,-5.015) 79.985,-5.015 ; 72.009,85.01 cw(c76.009,85.01) 80.009,85.01

## Text inside footprints (layer, text, board x,y; h text height)
J2: Top Overlay "GND" at 30.836,8.5 h1.52; Top Overlay "12V" at 40.742,8.484 h1.52
TP1: Top Overlay "CLK" at 47.701,12.319 h0.5 r90; Top Overlay "RST" at 50.887,12.319 h0.5 r90; Top Overlay "CO" at 48.763,12.319 h0.5 r90; Top Overlay "BO" at 51.95,12.319 h0.5 r90; Top Overlay "RI" at 49.825,12.319 h0.5 r90